# Altium PCB v0-9Bcpu.PcbDoc (part 2 of 2)
Units mil, origin at the board's own origin, x right, y up, seen from the top; angles counter-clockwise.
Board outline 3900 x 3900 mil, 2 copper layers (Top Layer, Bottom Layer); 133 components, 139 nets, 510 pads, 236 vias.
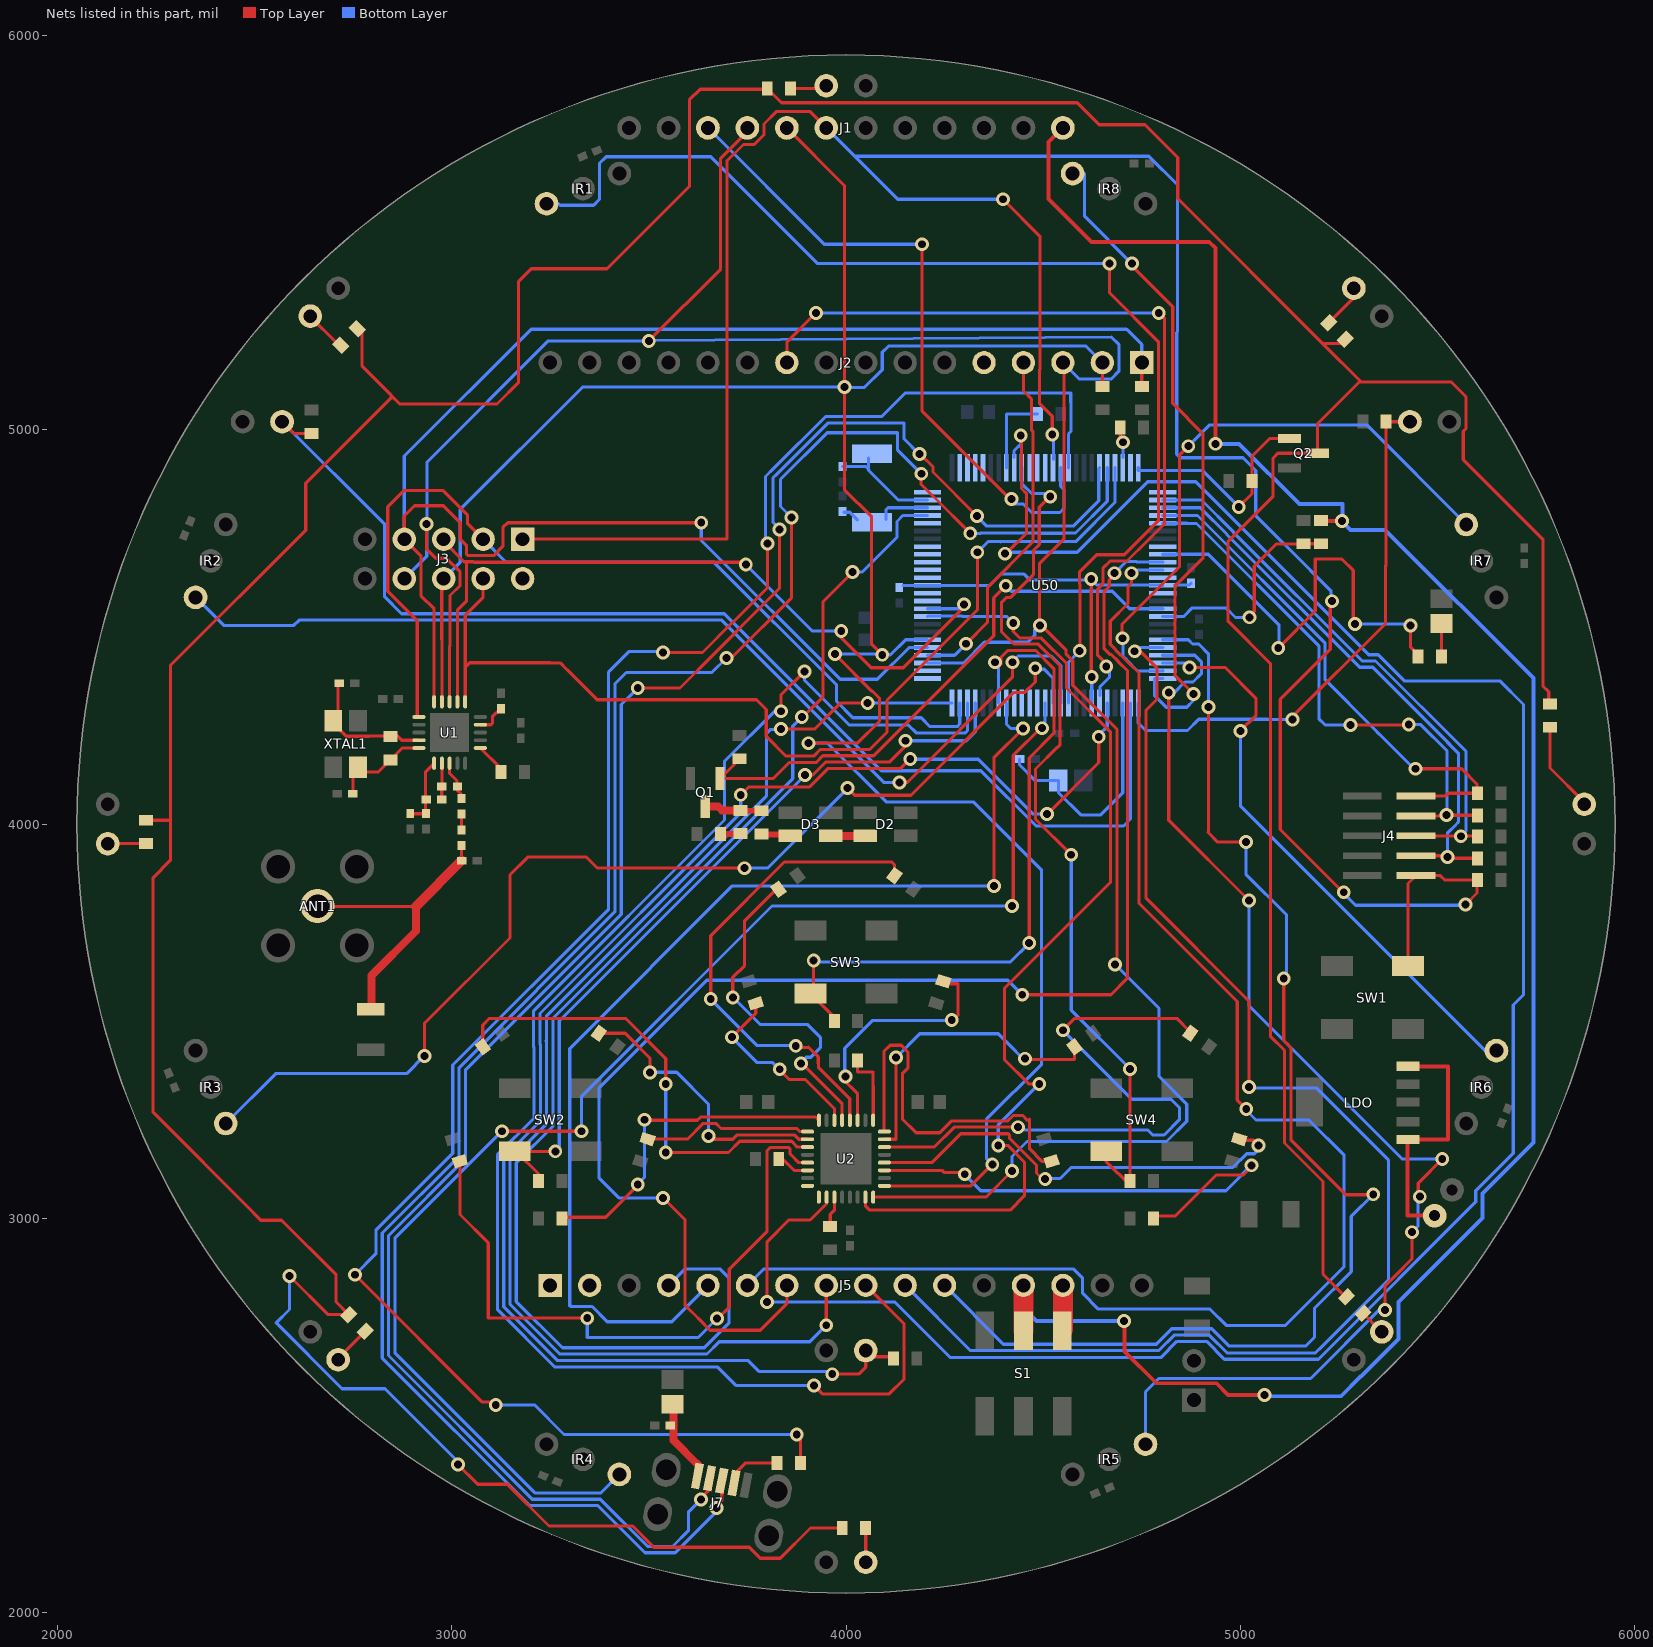
[diagram p2: the nets of this part, all layers, seen from the top]

## Via types
v1: diameter 35, hole 20, Top Layer to Bottom Layer, 228 vias
v2: diameter 25.98, hole 12.99, Top Layer to Bottom Layer, tented top, 4 vias
v3: diameter 180, hole 160, Top Layer to Bottom Layer, 4 vias

## Nets (pads, with @x,y where several pads share a name; then routed paths per layer and width w, separated by ;. In a path a pad name is that pad's centre, name@x,y a point inside that pad or via, vN(x,y) a via of type N, cw(c..) or ccw(c..) an arc to the next point about the centre after c; other vN are vias at no path point) (continued)
GYROA_Z_4: J2.10 U50.6 | length 2123.9
  Top Layer w8: J2.10@3850,5170 3850,5222 v1(3924,5296) ; v1@4665.5,4388.7 4665.5,4400 4638,4427.5 4638,4595.28 4651.5,4608.78 4651.5,4648.22 4670.08,4666.8 4712.42,4666.8 4739.08,4693.45 4739.45,4693.45 4808,4762 4808,5281 v1(4793,5296)
  Bottom Layer w8: v1(3924,5296) v1(4793,5296) ; U50.6@4644,4326 4644,4348 4668,4372 v1@4668,4394
  other v1: 4660,4399
IR_RECV_0: IR1.1 U50.10 | length 2947.8
  Top Layer w8: v1@4592,4439 4592,4439.06 4593,4440.06 4593,4608.28 4592.5,4608.78 4592.5,4639.5 4635.8,4682.8 4705.8,4682.8 4723.08,4700.08 4792,4769 4792,5222.66 4668,5346.66 v1(4668,5421) ; v1(4592.5,4439.06) v1@4593,4439.56
  Bottom Layer w8: IR1.1@3240.61,5572.73 3271,5572.73 3274.73,5569 3360,5569 3375,5584 3375,5675 3392,5692 3657,5692 3928,5421 v1(4668,5421) ; U50.10@4564.06,4306.77 4564.06,4410.61 v1(4592.5,4439.06)
IR_RECV_1: IR2.1 U50.11 | length 2662.9
  Top Layer w8: v1@4137,4106 4156,4106 4422,4372 v1(4422,4410)
  Bottom Layer w8: IR2.1@2350.73,4574.61 2421.84,4503.5 2600,4503.5 2613.5,4517 3685,4517 4097,4105 v1(4136,4105) ; v1@4418,4408 4436,4426 4520,4426 4544.37,4401.63 U50.11@4544.37,4306.77
IR_RECV_2: IR3.1 U50.12 | length 2846.2
  Top Layer w8: v1(2931,3412) 2931,3494 3148,3711 3148,3871 3193,3916 3342,3916 3370,3888 v1(3743,3888) ; v1(4004,4091) 4022,4073 4164.91,4073 4425.61,4333.7 4453.7,4333.7 4480,4360 v1@4480,4394
  Bottom Layer w8: IR3.1@2427.27,3240.61 2553.66,3367 2886,3367 v1(2931,3412) ; v1(3743,3888) 3801,3888 v1(4004,4091) ; v1@4481.5,4392.5 4502.5,4392.5 4524.69,4370.31 U50.12@4524.69,4306.77
  other v1: 4480,4395
IR_RECV_3: IR4.1 U50.13 | length 3549.9
  Top Layer w8: v1(3128,3221) v1(3329,3221) ; v1(4421,3792) 4424,3792 4424,4174 4496,4246 4497,4245 v1(4497,4243)
  Bottom Layer w8: v1(3128,3221) 3127.25,3221 2856,2949.75 2856,2659 3211,2304 3378.66,2304 IR4.1@3425.39,2350.73 ; v1(3329,3221) 3329,3308.63 3812.37,3792 v1(4421,3792) ; v1(4497,4243) 4497,4245 4496,4246 4505,4255 U50.13@4505,4306.77
IR_RECV_4: IR5.1 U50.97 | length 3041.4
  Top Layer w8: v1(4818.5,4333) 4818.5,4300.85 4819,4300.35 4819,4233.65 4818.5,4233.15 4818.5,4009.5 v1(5022,3806) ; v1(5367,2768) 5367,2829.07 5394,2856.07 5394.07,2856.07 5435,2897 v1(5435,2965) ; v1(5455,3055) 5451,3059 5451,3089.5 v1(5512,3150.5)
  Bottom Layer w8: IR5.1@4759.39,2427.27 4759.39,2560 4793.39,2594 5065,2594 ; U50.97@4803.23,4427.83 4884.17,4427.83 4901,4411 4901,4381.07 4880,4360.07 4859.39,4360.07 4832.32,4333 v1(4818.5,4333) ; v1(5022,3806) 5022,3539 5410.5,3150.5 v1(5512,3150.5) ; 5067.28,2594 5065,2594 ; v1(5367,2768) 5352,2768 5178,2594 5065,2594 ; v1(5435,2965) 5450.63,2980.63 5450.63,3050.63 v1(5455,3055)
IR_RECV_5: IR6.1 U50.98 | length 1469
  Top Layer w8: v1(4871,4397) 4961,4397 5040,4318 5040,4276 v1(5000,4236)
  Bottom Layer w8: U50.98@4803.23,4408.15 4859.85,4408.15 v1(4871,4397) ; v1(5000,4236) 5000,4046 5620.61,3425.39 IR6.1@5649.27,3425.39
IR_RECV_6: IR7.1 U50.99 | length 1551.3
  Top Layer w8: v1@4700,4471 4700,4507 4846,4653 4846,4936 v1(4868,4958)
  Bottom Layer w8: v1(4701,4471) 4702.5,4469.5 4702.5,4425.78 4711,4417.28 4711,4416.28 4739.28,4388 4802.76,4388 U50.99@4803.23,4388.46 ; v1(4868,4958) 4922,5012 5320.12,5012 IR7.1@5572.73,4759.39
IR_RECV_7: IR8.1 U50.100 | length 1722.3
  Top Layer w8: v1(4725,5421) 4725,5415.59 4828.59,5312 4828.59,5066.41 4905,4990 4905,4674 4834,4603 4834,4377 v1(4881,4330)
  Bottom Layer w8: IR8.1@4574.61,5649.27 4605,5649.27 4605,5541 v1(4725,5421) ; U50.100@4803.23,4368.78 4782,4368.78 4782,4326 4812,4296 4864,4296 4881,4313 v1(4881,4330)
JTAG_TCK: J4.4 R12.1 U50.80 | length 1397.3
  Top Layer w8: v1(5279,4251) 5426,4251 v1(5427,4252) ; J4.4@5445.11,4020.39 v1@5522,4020.39 ; v1(5523,4023) v1@5524,4022 ; v1@5528,4014 5528,4018 v1@5524,4022 ; R12.1@5601.69,4022 v1@5524,4022
  Bottom Layer w8: U50.80@4803.23,4762.48 4864,4762.48 4864.48,4762 4888.75,4762 5199,4451.75 5199,4267 5215,4251 v1(5279,4251) ; v1(5427,4252) 5457.37,4252 5524,4185.37 5524,4024 v1(5523,4023)
JTAG_TDI: J4.8 R18.1 U50.78 | length 1444.7
  Top Layer w8: J4.8@5445.11,3919.61 v1@5519,3919.61 ; v1@5525.61,3913 R18.1@5601.47,3913
  Bottom Layer w8: U50.78@4803.23,4801.85 4898.52,4801.85 4966.02,4734.36 4966.02,4733.36 5299.69,4399.69 ; 5302.04,4397.33 5336.04,4397.33 5530,4203.37 ; 5525,4207 5552.69,4179.31 5552.69,4004.69 5546.78,3998.78 ; v1@5526,3910.63 v1@5526,3916 ; v1@5527,3917 5525,3919 5530,3924 5525,3929 5525,3976.72 5546.78,3998.5
  other v1: 5525,3916
JTAG_TDO: J4.6 R17.1 U50.77 | length 1412.2
  Top Layer w8: J4.6@5445.11,3970 5601.47,3970 R17.1@5601.47,3968
  Bottom Layer w8: U50.77@4803.23,4821.54 4901.46,4821.54 4982.02,4740.98 4982.02,4739.98 5308.67,4413.33 5342.67,4413.33 5572,4184 5572,3982 v1(5559,3969)
JTAG_TMS: J4.2 R11.1 U50.79 | length 1359
  Top Layer w8: J4.2@5413,4070.79 J4.2@5445.11,4070.79 5519,4070.79 5526.21,4078 R11.1@5601.47,4078 ; v1(5444,4140) 5561,4140 5600,4101 R11.1@5600,4085
  Bottom Layer w8: U50.79@4803.23,4782.17 4891.21,4782.17 5215,4458.37 5215,4365.35 5337.68,4242.68 ; 5352.35,4228 5337.68,4242.68 ; v1@5443,4144 5436.35,4144 5337.68,4242.68
LED_BLUE_0: D21.2 U2.3 | length 1299.3
  Top Layer w8: U2.3@4097.44,3121.77 4243.73,3121.77 4249.5,3116 4289,3116 4293,3112 v1(4301,3112) ; D21.2@4779.53,3000 4779.53,3006 4835,3006 4939,3110 5008,3110 5028,3130 v1(5028,3134.5)
  Bottom Layer w8: v1@4293.5,3118.5 4342,3070 4963.5,3070 v1(5028,3134.5)
LED_BLUE_1: D19.2 U2.4 | length 1136.8
  Top Layer w8: U2.4@4097.44,3141.46 4217.5,3141.46 4290.54,3214.5 4411.07,3214.5 4414.6,3210.98 4414.6,3203.12 4483,3134.72 4483,3115 4499,3099 v1@4506,3099 ; D19.2@4998,3198 5033,3198 v1(5046,3185)
  Bottom Layer w8: v1@4506,3101 4543,3101 4571,3129 4980.78,3129 5015.78,3164 5035,3164 5046,3175 v1(5046,3185)
  other v1: 4505,3100
LED_BLUE_2: D13.2 U2.6 | length 1553.6
  Top Layer w8: U2.6@4097.44,3180.83 4134.83,3180.83 4135,3181 4224,3181 4274.29,3231.29 v1(4436,3231.29) ; v1(4550,3477) 4580,3507 4838.65,3507 4873.11,3472.54 D13.2@4873.11,3469.36
  Bottom Layer w8: v1(4436,3231.29) 4446.71,3231.29 4454,3224 4765.28,3224 4777.78,3211.5 4806.5,3211.5 4846,3251 4846,3280 4824,3302 4725,3302 v1(4550,3477)
LED_BLUE_3: D12.2 U2.7 | length 779.7
  Top Layer w8: U2.7@4097.44,3200.51 4127,3200.51 v1(4127,3408) ; v1(4454,3405) 4451.64,3402.64 4579.11,3402.64 D12.2@4579.11,3434.64
  Bottom Layer w8: v1(4127,3408) 4187,3468 4386,3468 4411,3443 ; 4411.29,3443 4411,3443 ; v1@4451.36,3402.64 4411,3443 ; v1@4451.64,3402.64 v1(4454,3405)
LED_BLUE_4: D18.2 U2.8 | length 959.1
  Top Layer w8: 4096,3418.72 4096,3220.2 U2.8@4097.44,3220.2 ; 4096,3421 4096,3423 4112,3439 4140,3439 4157,3422 4157,3381 4143,3367 4143,3252 4178,3217 4237.37,3217 4267.66,3247.29 4410.28,3247.29 4423.78,3260.79 4448.22,3260.79 4461.26,3247.76 4465.5,3252 4465.5,3176.13 4496.71,3144.92 D18.2@4521.12,3144.92
LED_EXTRA: D17.2 U2.22 | length 84.3
  Top Layer w8: D17.2@3830,3150 3840,3150 3868.23,3121.77 U2.22@3902.56,3121.77
LED_FAULT: U2.25
LED_GREEN_0: D14.2 U2.9 | length 190.5
  Top Layer w8: D14.2@4029.53,3400 4029.53,3371 4068.5,3371 4068.9,3370.6 4068.9,3335.5 4069,3335.4 4069,3248.84 U2.9@4068.9,3248.74
LED_GREEN_1: D9.2 U2.11 | length 662.3
  Top Layer w8: v1@3990,3358 v1@3992,3358 ; v1@3992,3359 v1@3992,3358 ; v1@4001,3358 v1@3992,3358 ; U2.11@4029.53,3248.74 4029.53,3315.75 3992,3353.28 v1@3992,3358 ; D9.2@4247.12,3601.08 4247.12,3603 4248.08,3602.04 4255.12,3595 4284,3595 4284,3515 4272,3503 v1(4268,3503)
  Bottom Layer w8: v1@3997,3361 3997,3431 4068,3502 v1@4280,3502
  other v1: 3999,3360
LED_GREEN_2: D7.2 U2.12 | length 1274.4
  Top Layer w8: v1(3657,3556) 3657,3717 3843.79,3903.79 4116.21,3903.79 4123.11,3896.89 D7.2@4123.11,3869.36 ; v1(3872.69,3437.5) 3872.69,3438.69 v1@3874,3440 ; v1@3873,3441 v1@3874,3440 ; U2.12@4009.84,3248.74 4009.5,3249.08 4009.5,3303.5 3930,3383 3930,3392.01 3929.5,3392.51 3929.5,3409.5 3905,3434 3905,3433 3887.78,3433.5 3887.28,3433 3881,3433 3874.6,3439.41 v1@3874,3440
  Bottom Layer w8: v1(3657,3556) 3775,3438 3861,3438 3867.1,3431.91 v1@3874,3425
LED_GREEN_3: D5.2 U2.13 | length 870.5
  Top Layer w8: v1(3713,3560) 3713,3610.95 ; 3713.05,3610.95 3743,3640.91 3743,3754.91 3822.74,3834.64 D5.2@3829.11,3834.64 ; v1@3885,3396 3990.16,3290.84 U2.13@3990.16,3248.74
  Bottom Layer w8: v1@3714,3560 3782,3492 3902,3492 3935,3459 3935,3433 3910.5,3408.5 3898.5,3408.5 v1@3886,3396
  other v1: 3886,3393
LED_GREEN_4: D8.2 U2.14 | length 474.8
  Top Layer w8: v1(3710.56,3459.44) 3771.12,3520 D8.2@3771.12,3544.92 ; v1@3831,3377 3856,3352 3897,3352 3970.47,3278.53 U2.14@3970.47,3248.74
  Bottom Layer w8: v1(3710.56,3459.44) 3775,3395 3814,3395 v1@3831,3378
  other v1: 3832,3378
LED_HEARTBEAT: R10.2 U50.84 | length 1163.4
  Top Layer w8: v1(5096,4446) 5190,4540 5190,4672 5257,4672 5286,4643 5286,4512 v1(5291,4507) ; v1(5431,4503) 5431,4449 R10.2@5446,4434 ; R10.2@5441,4422 R10.2@5449,4422
  Bottom Layer w8: U50.84@4803.23,4683.74 4803.49,4684 4918.66,4684 5098.33,4504.33 5098.33,4448.33 v1(5096,4446) ; v1(5291,4507) 5427,4507 v1@5430,4504
LED_IR_BEACON: Q1.1 R35.2 U50.91 | length 1477.1
  Top Layer w8: Q1.1@3680.4,4115.43 Q1.1@3680.4,4115 ; R35.2@3730,4165.47 3730,4164.6 Q1.1@3680.4,4115 ; v1(4405.07,4604) 4374.5,4573.43 4374.5,4477.5 4070,4173 3941.46,4173 3924.46,4156 3856,4156 3815,4115 Q1.1@3680.4,4115
  Bottom Layer w8: v1(4405.07,4604) 4419.07,4590 4675.06,4590 4719.11,4545.94 U50.91@4803.23,4545.94
LED_IR_COMMS: Q2.1 R36.2 U50.75 | length 555.9
  Top Layer w8: v1(4996,4804) 5029.53,4837.53 R36.2@5029.53,4870 5029.53,4932.53 5074.4,4977.4 Q2.1@5124.57,4977.4
  Bottom Layer w8: U50.75@4741.22,4903.23 4741.22,4896.5 4903.5,4896.5 v1(4996,4804)
LED_MODE: U2.26 U50.59 | length 5754.8
  Top Layer w8: v1(3800,2788) 3800,2941 3855,2996 3908.98,2996 3950.79,3037.8 U2.26@3950.79,3053.86 ; v1(4402.78,4685.5) 4405.5,4685.5 4458,4738 4458,4837.81 4445,4850.81 4445,4983 v1(4443,4985)
  Bottom Layer w8: v1(3800,2788) 4124,2788 4265,2647 4798,2647 4839,2688 4914.49,2688 4959.49,2643 5198,2643 5202,2647 ; v1(4402.78,4685.5) 4406.28,4689 4586,4689 4765,4868 4887,4868 5325.67,4429.33 5349.3,4429.33 5415.63,4363 5658,4363 5718,4303 5718,4183 ; U50.59@4426,4930 4426,4946 4444,4964 4444,4986 v1(4443,4985) ; 5203,2648 5597,3042 5597,3070.04 5692,3165.04 5692,3541 5718,3567 5718,4183 ; 5718,4192 5718,4183
LED_RED_0: D20.2 U2.16 | length 858.4
  Top Layer w8: D20.2@3279.53,3000 3278,3003 3391,3003 v1@3472,3084 ; v1(3489,3250) 3486,3250 3487.26,3248.74 3623.27,3248.74 3631.53,3257 3922.84,3257 U2.16@3931.1,3248.74
  Bottom Layer w8: v1@3472,3085 v1(3472,3086) 3472,3087 3489,3104 v1(3489,3250)
LED_RED_1: D16.2 U2.17 | length 430.6
  Top Layer w8: D16.2@3497.12,3201.08 3598.24,3201.08 3638.16,3241 3670,3241 3683,3228 3875,3228 3882.8,3220.2 U2.17@3902.56,3220.2
LED_RED_2: D11.2 U2.18 | length 719.5
  Top Layer w8: D11.2@3373.11,3469.36 3440,3469.36 3503,3406.36 v1@3503,3371 ; v1(3651,3209) 3659.49,3200.51 3712.88,3200.51 3724.09,3211.72 3868.66,3211.72 3879.86,3200.51 U2.18@3902.56,3200.51
  Bottom Layer w8: v1@3502.5,3370.5 3570.5,3370.5 3651,3290 v1(3651,3209) v1@3651,3208
  other v1: 3503,3370
LED_RED_3: D10.2 U2.19 | length 1184.7
  Top Layer w8: D10.2@3079.11,3434.64 3079.11,3490.11 3096,3507 3440.96,3507 3542.96,3405 ; v1(3543,3167) 3702,3167 3730.72,3195.72 3862.03,3195.72 3873,3184.75 3873,3184 3876.17,3180.83 U2.19@3902.56,3180.83 ; v1(3543,3341) 3543,3405
  Bottom Layer w8: v1(3543,3167) v1(3543,3341)
LED_RED_4: D15.2 U2.21 | length 1683.5
  Top Layer w8: D15.2@3021.12,3144.92 3021.12,3009.88 3093,2938 3093,2747 v1(3344,2747) ; v1@3675,2746 3704,2775 3704,2871 3800,2967 3800,3172 3807.72,3179.72 3854.66,3179.72 3857.94,3176.43 3857.94,3163.51 3880,3141.46 U2.21@3902.56,3141.46
  Bottom Layer w8: v1(3344,2747) 3344,2698 3625,2698 v1(3673,2746)
LED_SDO: U2.24
LIGHT_B: R28.1 R29.1 U50.5 | length 3878.5
  Top Layer w8: v1@3733,4073 3754,4094 3907.72,4094 3954.72,4141 4139,4141 v1(4163,4165) ; v1(3965,2605) 4032,2605 4050,2623 R29.1@4050,2665 4066,2649 4116.47,2649 R28.1@4120.47,2645 ; v1(4510,4025) 4641,4156 v1(4641,4221)
  Bottom Layer w8: v1(3733,4074) 3733,4028.37 3224,3519.37 3224,3441.51 3225,3440.51 3225,3247 3132,3154 3132,2775.75 3267.75,2640 3751,2640 3779,2612 3958,2612 v1(3965,2605) ; v1(4163,4165) 4164,4164 4335.63,4164 4474.63,4025 v1(4510,4025) ; v1@4641,4225.52 4662.48,4247 U50.5@4662.48,4306.77
LIGHT_FL: R5.1 R6.1 U50.2 | length 3072.6
  Top Layer w8: R5.1@2570,5020 2599.53,4990.47 R6.1@2645,4990.47
  Bottom Layer w8: R5.1@2570,5020 2830,4760 2830,4576 2873,4533 3691.63,4533 4089.63,4135 4342,4135 4482,3995 4704,3995 4721.54,4012.54 U50.2@4721.54,4306.77
LIGHT_FR: R8.1 R9.1 U50.1 | length 1375.7
  Top Layer w8: v1@5129,4269 5368,4508 5368,4655 5369.53,4655 R9.1@5369.53,5020 R8.1@5430,5020
  Bottom Layer w8: U50.1@4741.22,4306.77 4741.22,4256 4760.22,4237 4866,4237 4894.5,4265.5 5068.5,4265.5 ; 5066,4265 v1(5132,4265)
MISC: J3.2 | length 7.1
  Top Layer w8: J3.2@3175,4627 J3.2@3180,4622
MOT0_CUR: J5.1
MOT0_PWMA: J5.4 U50.47 | length 3384.6
  Top Layer w8: v1@3889,4270 3942,4323 3942,4564.17 v1(4016.83,4639)
  Bottom Layer w8: J5.4@3550,2830 3592,2872 3680,2872 3703,2849 3703,2734 3641,2672 3281,2672 3164,2789 3164,3140.75 3257,3233.75 3257,3507.12 3865,4115.12 3865,4248 v1(3888,4271) ; v1(4016.83,4639) 4041,4639 4129.18,4727.18 4129.18,4767.18 4144.17,4782.17 U50.47@4206.77,4782.17
MOT0_PWMB: J5.5 U50.18 | length 2814.6
  Top Layer w8: v1(4375,3843) 4375,4168 v1(4449,4242)
  Bottom Layer w8: 3304,2776.5 3356.22,2776.5 3394.72,2738 3558,2738 J5.5@3636.5,2816.5 ; 3304,2777 3301,2777 3299.5,2778.5 3299.5,3430.5 3712,3843 v1(4375,3843) ; U50.18@4406.57,4306.77 4406.57,4253.43 4418,4242 v1(4449,4242)
MOT1_CUR: J5.2
MOT1_PWMA: J5.6 U50.86 | length 3841.6
  Top Layer w8: 4697.13,4428.22 4670,4455.35 4670,4514 4715,4559 4715,4602 4724,4611 v1(4724,4636) ; 4697.41,4428.22 4730,4395.63 4730.37,4395.63 4743,4383 4743,3799 4992,3550 4992,3300 v1(5015,3277)
  Bottom Layer w8: J5.6@3750,2830 3792,2872 4576,2872 4600,2848 4600,2810 4640,2770 4923,2770 4965,2728 5113,2728 5263,2878 5263,3160 5173.5,3249.5 5039.5,3249.5 v1@5018,3271 ; v1@4733.37,4644.37 U50.86@4803.23,4644.37
MOT1_PWMB: J5.7 U50.85 | length 3748.5
  Top Layer w8: v1(3536,3052) 3592,2996 3592,2779.5 3607.75,2763.75 3608.25,2763.75 3639.25,2732.75 3639.25,2732.25 3655,2716.5 3782.5,2716.5 3850,2784 J5.7@3850,2830 ; v1(4447,3567) 4672,3567 4713.48,3608.48 4713.48,4339.52 4713.36,4339.64 4714,4340.28 4714,4388 4690.5,4411.5 ; v1@4681.5,4632.5 4667.5,4618.5 4667.5,4602.15 4654,4588.65 4654,4445.72 4670.22,4429.5 4673.22,4429.5 4690.5,4412.22
  Bottom Layer w8: v1(3536,3052) 3424,3052 3374,3102 3374,3331 3647,3604 4410,3604 v1(4447,3567) ; v1@4680,4636 v1(4681,4636) 4710.5,4665.5 4736.22,4665.5 4737.72,4664 4803.17,4664 U50.85@4803.23,4664.06
NetANT1_1: ANT1.1 ANT2.1 C5.1 C6.2 | length 763.5
  Top Layer w8: ANT1.1@2657,3791 2908,3791 ; C6.2@3025.31,3907 C5.1@3025.31,3946.69
  Top Layer w20: ANT2.1@2795,3530 2797,3531 2797,3616 2909.32,3728.32 2909.32,3791
  Top Layer w25: 2909.32,3791 C6.2@3025.31,3907
NetC1_2: C1.2 R1.1 U1.9 XTAL1.1 | length 373
  Top Layer w8: C1.2@2715.31,4357 2712,4359 2712,4287 2701,4276 2700,4276 XTAL1.1@2700,4262 2700,4258 2697,4258 2732.56,4222.44 2790.6,4222.44 2791.16,4223 2836,4223 2842,4229 2845,4229 R1.1@2845,4221.53 2850,4221.53 2850,4229 2857,4229 2873.69,4212.32 U1.9@2917.24,4212.32
NetC2_2: C2.2 R1.2 U1.10 XTAL1.3 | length 337.1
  Top Layer w8: C2.2@2749.69,4077 2750,4078 2750,4143 2764,4157 2770.05,4150.95 2776,4145 2775,4145 2775,4139 XTAL1.3@2762.99,4139 ; XTAL1.3@2762.99,4143.89 XTAL1.3@2762.99,4139 ; U1.10@2917.24,4192.63 2874.63,4192.63 2814,4132 2774,4132 2774,4121 2757.05,4137.95 2757,4138 2762.99,4138 XTAL1.3@2762.99,4139
NetC3_2: C3.2 C4.2 L2.2 U1.11 | length 179.2
  Top Layer w8: C4.2@2894,4026.69 2894,4026 2934,4026 L2.2@2934,4062 ; L2.2@2935.31,4062 L2.2@2934,4062 ; U1.11@2955.63,4154.24 2934,4132.61 L2.2@2934,4062
NetC5_2: C5.2 L3.2 | length 36.7
  Top Layer w8: C5.2@3024,3986 3025,3987 L3.2@3025,4022.31
NetC7_2: C7.2 U1.19 | length 79.5
  Top Layer w8: U1.19@3072.76,4251.69 3099.69,4251.69 3104.08,4256.08 3104.08,4273.08 3124,4293 C7.2@3125,4292.31
NetC15_2: C15.2 J7.1 L5.1 | length 214.8
  Top Layer w10: 3560,2491 L5.1@3560,2528.5
  Top Layer w20: L5.1@3560,2528.5 3562.56,2524.44 C15.2@3562.56,2475 ; C15.2@3563,2475 3563,2437 J7.1@3623.14,2376.86
NetD1_2: D1.2 R10.1 | length 78.5
  Top Layer w8: R10.1@5509.53,4425 D1.2@5509.53,4503.53
NetD2_4: D2.4 D3.2 | length 87.8
  Top Layer w8: D2.4@4048.82,3970 D2.4@4049,3970
  Top Layer w20: D3.2@3961.18,3970 D2.4@4048.82,3970
NetD3_4: D3.4 R15.2 | length 77.3
  Top Layer w8: D3.4@3832.82,3973 3832.82,3970 D3.4@3858.82,3970
  Top Layer w15: R15.2@3786,3974.47 3786,3973 D3.4@3832.82,3973
NetD4_2: D4.2 R16.2 | length 50.5
  Top Layer w15: D4.2@3681.53,3975 3730,3975 R16.2@3732,3975.47
NetJ6_1: J6.1 LDO.1 LDO.5 | length 649.6
  Top Layer w10: LDO.5@5425,3385.55 5526,3385.55 5526,3200 LDO.1@5425,3200 5424,3200 5424,3007 J6.1@5492,3007
NetJ7_4: J7.4 R3.2 | length 120.5
  Top Layer w8: J7.4@3717,2351 3746,2380 R3.2@3825.47,2380
NetL1_1: L1.1 L2.1 U1.12 | length 92.4
  Top Layer w8: L2.1@2974.69,4062 2975,4063 2975,4099 2975.32,4099.32 U1.12@2975.32,4154.24
NetL1_2: L1.2 L3.1 U1.13 | length 81.7
  Top Layer w8: U1.13@2995,4154.24 2995,4128 3014,4109 L1.2@3014,4097 ; L1.2@3014.69,4085.31 L3.1@3025,4075 ; L1.2@3014.69,4095 L1.2@3014.69,4097
NetQ1_3: Q1.3 R15.1 R16.1 | length 140.2
  Top Layer w8: R16.1@3728,4034.53 R16.1@3732,4034.53
  Top Layer w15: R16.1@3739,4033.53 R15.1@3786,4033.53
  Top Layer w20: Q1.3@3643,4044.57 3676,4044.57 3686.04,4034.53 R16.1@3728,4034.53
NetQ2_3: Q2.3 R4.2 R7.2 R13.2 R14.2 R19.2 R26.2 R27.2 R32.2 | length 12443.6
  Top Layer w8: R14.2@2220,4006 R14.2@2223.53,4009.53 ; R14.2@2222,4010 2222.47,4009.53 R14.2@2223.53,4009.53 ; R14.2@2224,4010 R14.2@2223.53,4009.53 ; v1(2589,2854) 2687,2756 R27.2@2735,2756 ; R27.2@2739.12,2755.88 2707,2788 2707,2857 2568.78,2995.22 2515.78,2995.22 2499.5,3011.5 2499.5,3012.5 2243,3269 2243,3864 2287,3908 2287,4009.53 ; R19.2@2760.88,5255.88 2773,5255.88 2773,5161 2846,5088 ; 2846,5089 2846,5088 ; v1(3016,2376) 3066,2326 3141,2326 3247,2220 3459,2220 3513,2166 3754.78,2166 3782.46,2138.32 3833.32,2138.32 3910,2215 R32.2@3990.47,2215 ; 5076,3863 5076,3462 5112,3426 5112,3191 5209.36,3093.64 5209.36,2858.64 5265,2803 5270,2803 R26.2@5269.12,2800.88 ; 5076,3865 5076,4407 4969,4514 4969,4717 5083,4831 5083,4928 5095,4940 Q2.3@5195.43,4940 5195.43,5014.43 5302,5121 5306,5121 ; R7.2@5266,5229 5255,5218 5209,5218 ; R13.2@5785,4304.53 5782,4307 5782,4335 5767,4350 5767,4722 5565,4924 5565,4995.6 5572,5002.6 5572,5083 5534,5121 5306,5121 ; R14.2@2223.53,4009.53 R14.2@2225,4009.53 2287,4009.53 ; 2287,4009.53 2287,4402 2630,4745 2630,4864 2846,5080 2846,5087 ; 2846,5087 2868,5065 3115,5065 3170,5120 3170,5376 3202,5408 3394,5408 3602.5,5616.5 3603,5619 3603,5836 3630,5863 3798.47,5863 R4.2@3800.47,5865 3836.47,5829 4586,5829 4642,5773 4758,5773 4841,5690 4841,5586 5209,5218 ; 2846,5087 2846,5088 ; 5209,5218 5306,5121
  Bottom Layer w8: v1(2589,2854) 2589,2769 2555,2735 2722,2568 2831,2568 3015,2384 v1@3015,2381
NetR2_2: R2.2 U1.16 | length 87.9
  Top Layer w8: U1.16@3072.76,4192.63 3124.39,4141 3126,4141 3126,4139 3128.85,4139 3128.85,4135.38 R2.2@3125.47,4132
NetR4_1: R4.1 T1.1 | length 100
  Top Layer w8: R4.1@3859.53,5865 3946,5865 3948,5867 3950.47,5865.47 3951,5866 3951,5867 3950,5867 T1.1@3950,5872
NetR7_1: R7.1 T8.1 | length 115.6
  Top Layer w8: R7.1@5224.12,5270.88 5285,5331.76 5285,5356 5284,5357 T8.1@5287.64,5358.36
NetR13_1: R13.1 T7.1 | length 231.5
  Top Layer w8: R13.1@5785,4245.47 5785,4142 5872,4055 T7.1@5872,4050
NetR14_1: R14.1 T3.1 | length 97.2
  Top Layer w8: T3.1@2128,3950 2130,3950 2130.47,3950.47 R14.1@2225,3950.47
NetR19_1: R19.1 T2.1 | length 114.6
  Top Layer w8: T2.1@2641.64,5287.64 2643,5286 2643,5285.12 R19.1@2705.64,5222.48 ; R19.1@2705.64,5223.64 R19.1@2705.64,5222.48 ; R19.1@2719.12,5214.12 2705.64,5214.12 R19.1@2705.64,5222.48
NetR25_2: R25.2 U2.27 | length 78.2
  Top Layer w8: R25.2@3960,2980 3960,3010 3970.47,3020.47 U2.27@3970.47,3053.86
NetR26_1: R26.1 T6.1 | length 66.7
  Top Layer w8: R26.1@5310.88,2759.12 5355,2715 T6.1@5358.36,2712.36
NetR27_1: R27.1 T4.1 | length 103.1
  Top Layer w8: T4.1@2712.36,2641.64 2715,2641 2715,2648.24 R27.1@2780.88,2714.12
NetR32_1: R32.1 T5.1 | length 87.5
  Top Layer w8: R32.1@4049.53,2215 4049,2214 4050,2213 T5.1@4050,2128
NetR33_2: R33.2 U50.58 | length 214.2
  Bottom Layer w8: U50.58@4406.57,4903.23 4406.57,4960 ; 4407,4961 4407,5040 R33.2@4485.47,5040
OSC0: C29.2 U50.48 XTAL2.1 | length 174.4
  Bottom Layer w8: C29.2@3995,4790.31 4009.69,4790.31 XTAL2.1@4029,4771 ; XTAL2.1@4101,4772 4101,4796.31 4106.54,4801.85 U50.48@4206.77,4801.85
OSC1: C30.2 U50.49 XTAL2.2 | length 282.9
  Bottom Layer w8: C30.2@3991,4906.69 4049.31,4906.69 4057,4899 ; XTAL2.2@4057,4928 4057,4899 ; 4058,4898 4057,4899 ; U50.49@4206.77,4821.54 4132.08,4821.54 4057,4896.61 4057,4899
PA0: U50.26
PA1: U50.27
PB7: U50.89
PE0: U50.74
PF1: U50.61
PF4: U50.42
PF5: U50.41
PG7: U50.36
PH3: U50.83
PH4: U50.76
PH5: U50.63
PH6: U50.62
PH7: U50.15
PJ0: U50.14
PJ1: U50.87
PJ2: U50.39
PJ3: U50.50
PJ4: U50.52
PJ5: U50.53
PJ6: U50.54
PJ7: U50.55
QEI_0A: J5.8 U50.25 | length 3205.2
  Top Layer w8: v1(3835,4241) 3921,4241 3987,4307 v1(4055,4307) ; v1(3950,2729) J5.8@3950,2830
  Bottom Layer w8: v1@3835,4240 3809,4240 3798,4229 3798,4070.75 3241,3513.75 3241,3451.37 3240,3450.37 3240,3448.14 3241,3447.14 3241,3240.37 3148,3147.37 3148,2782.37 3274.37,2656 3647.63,2656 3678.63,2687 3908,2687 v1(3950,2729) ; v1(4055,4307) 4268.78,4307 U50.25@4268.78,4306.77
QEI_0B: J5.9 U50.23 | length 3927.6
  Top Layer w8: v1(3835,4286) 3835,4327 v1(3895,4387) ; v1(3919,2576) 3940,2555 4110,2555 4147,2592 4147,2733 J5.9@4050,2830
  Bottom Layer w8: v1(3835,4286) 3819,4286 3692,4159 3692,4010 3208,3526 3208,3434.88 3209,3433.88 3209,3254 3116,3161 3116,2769.12 3262.12,2623 3675,2623 3722,2576 v1(3919,2576) ; v1(3895,4387) 3895,4364 4008,4251 4158,4251 4178,4231 4302.37,4231 4308.15,4236.78 U50.23@4308.15,4306.77
QEI_1A: J5.10 U50.96 | length 3470.3
  Top Layer w8: v1@4732,4437 4747,4437 4789,4395 4789,4317 4761,4289 4761,3812 5022,3551 v1(5022,3333)
  Bottom Layer w8: J5.10@4150,2830 4315,2665 4793.37,2665 4832.37,2704 4921.12,2704 4966.12,2659 5190.63,2659 5207.5,2675.87 5207.87,2675.87 5376,2844 5376,3147 5192,3331 v1@5022,3331 ; v1(4732,4438) 4741.52,4447.52 U50.96@4803.23,4447.52
QEI_1B: J5.11 U50.95 | length 3224
  Top Layer w8: v1(4919,4297) 4919,3980 4918,3979 4943,3954 v1(5014,3954) ; v1(5110,3608) 5110,3451 5121,3440 ; 5121,3439.63 5128,3432.63 5128,3199 5267,3060 v1@5334,3060
  Bottom Layer w8: J5.11@4250,2830 4399,2681 4786.75,2681 4825.75,2720 4927.75,2720 4971.75,2676 5165,2676 5188,2699 5188,2772 5281,2865 5281,3005 v1@5336.5,3060.5 ; U50.95@4803.23,4467.2 4867.75,4467.2 4878.45,4456.51 4894.49,4456.51 4919,4432 v1(4919,4297) ; v1@5016,3952 v1(5014,3954) 5014,3873 5117,3770 5117,3619 v1@5112,3614
  other v1: 5337,3061
RADIO_CE: J3.4 U1.1 U50.72 | length 2609.7
  Top Layer w8: U1.1@3034.37,4309.76 3034.37,4397.74 ; J3.4@3080,4622 3080,4574.94 3034.37,4529.31 3034.37,4397.74 ; v1(4333,4689) 4333,4542.5 4104,4313.5 4104,4233 4060,4189 3934.84,4189 3917.84,4172 3848,4172 3797.82,4222.18 3797.82,4290.18 3773,4315 3369,4315 3292.78,4391.22 3292.5,4391.22 3275.22,4408.5 3250.78,4408.5 3250.28,4409 3045.63,4409 3034.37,4397.74
  Bottom Layer w8: v1(4333,4689) 4360,4716 4392,4716 ; 4392,4715 4392,4716 ; U50.72@4682.17,4903.23 4682.17,4815.74 4582.43,4716 4392,4716
RADIO_IRQ: J3.3 U1.6 U50.24 | length 2376.9
  Top Layer w8: U1.6@2917.24,4271.37 2913,4271.37 2913,4515 2838,4590 2838,4804 2880,4846 2977.21,4846 3040.61,4782.61 3040.61,4761.39 J3.3@3080,4722
  Bottom Layer w8: J3.3@3080,4722 3138,4664 3665,4664 3976,4353 3976,4311 4017.5,4269.5 4190.5,4269.5 4213,4247 4282,4247 4288.46,4253.46 U50.24@4288.46,4306.77
RST: J1.6 J3.1 J4.10 R20.1 SW1.3 U50.64 | length 6859
  Top Layer w8: J3.1@3186,4723 3698,4723 3698,5681 3740,5723 3767.4,5723 3792,5747.6 3792,5775 3824,5807 3908,5807 J1.6@3950,5765 ; v1(4398,5584) 4491.53,5490.47 4491.53,5152.8 4491,5152.27 4491,5066 4523,5034 v1(4523,4988) ; v1(5232,4565) 5228,4561 5228,4443 5101,4316 5101,3986 5250,3837 5250,3827 v1(5262,3827) ; SW1.3@5425,3640 5425,3849.1 J4.10@5445.11,3869.21 5507.11,3869.21 5518.33,3858 R20.1@5601.47,3858 ; v1(5571,3796) 5600,3825 R20.1@5600,3854
  Bottom Layer w8: J1.6@3950,5765 4022,5693 ; v1(4398,5584) 4131,5584 4022,5693 ; U50.64@4526,4925 v1@4526,4984 ; 5178,4642 5230,4590 5230,4567 v1(5232,4565) ; 5179,4642 5039,4782 5039,4896.24 5006.74,4928.5 4848,4928.5 4838.5,4938 4838.5,5246.3 4840.5,5248.3 4840.5,5620.5 4768,5693 4022,5693 ; v1(5262,3827) 5262,3824 5292,3794 v1@5572,3794
RXIN: U50.37
RXIP: U50.40
SPI_MISO: J2.1 J3.7 R40.2 U1.5 U50.30 | length 4553.5
  Top Layer w8: U1.5@2955.63,4309.76 2955.63,4545.37 2922,4579 2922,4680 J3.7@2880,4722 2880,4781 2906,4807 2979,4807 3022,4764 3022,4722 3038,4706 3038,4684 3041,4681 3062.27,4681 3062.8,4680.47 3106.47,4680.47 3130,4704 3130,4752 3142,4764 v1(3633,4764) ; R40.2@4750,5109.53 J2.1@4750,5170
  Bottom Layer w8: J3.7@2880,4722 2880,4933 3201.53,5254.53 4711.47,5254.53 4750,5216 J2.1@4750,5170 ; v1(3633,4764) 3633,4719 3985,4367 4079.48,4367 4160,4447.52 U50.30@4206.77,4447.52
SPI_MOSI: J1.5 J2.2 J3.6 R41.2 U1.4 U2.1 U50.31 | length 6351
  Top Layer w8: U1.4@2975.32,4309.76 2975.32,4467.68 2975,4468 2975,4617 J3.6@2980,4622 ; J1.5@3850,5765 3996,5619 v1(3996,5108) 3996,4848 4065,4779 4065,4456 v1(4092,4429) ; v1@3904,4205 v1(3905,4205) 4029,4205 4085,4261 4085,4318.72 4067.22,4336.5 4065.63,4336.5 3972,4430.13 v1(3972,4431) ; U2.1@4097.44,3082.4 4316.4,3082.4 v1(4371,3137) ; R41.2@4650,5109.53 J2.2@4650,5170
  Bottom Layer w8: J3.6@2980,4622 3022,4664 3022,4797.69 3332.31,5108 v1(3996,5108) ; v1(3905,4205) 3953,4205 4102,4056 4323,4056 4496,3883 4496,3391 4356,3251 4356,3152 v1(4371,3137) ; v1(3972,4431) 4088,4431 v1@4091,4428 ; v1@3996,5107 4047,5107 4092,5152 4092,5196 4108,5212 4608,5212 J2.2@4650,5170 ; v1(4092,4429) 4112.95,4429 4151.15,4467.2 U50.31@4206.77,4467.2
SPI_SCK: J1.4 J2.3 J3.8 U1.3 U2.32 U50.28 | length 7168.5
  Top Layer w8: v1(2936,4761) 2936,4698 2960,4674 2986.73,4674 3021.53,4639.2 3021.53,4604.8 2996,4579.27 2996,4452 2995,4451 U1.3@2995,4309.76 ; v1(3500,5225) 3682,5407 3682,5687.63 3750,5755.63 J1.4@3750,5765 ; U2.32@4068.9,3053.86 4068.9,3054 4355,3054 v1(4421,3120) ; v1@4490.5,4508.5 4490.5,4571.22 ; 4491,4571.72 4491,4660.72 4552.5,4722.22 4552.5,5167.5 J2.3@4550,5170 ; v1@4492.5,4506.5 4558,4441 4558,4430.88 4575,4413.88 4575,4352 4687,4240 v1@4687,3649
  Bottom Layer w8: J3.8@2880,4622 2936,4678 ; v1(2936,4761) 2936,4678 ; v1(3500,5225) 3351,5225 ; U50.28@4206.77,4408.15 4298.15,4408.15 4351,4461 4461.04,4461 4478.5,4478.46 4478.5,4492.5 v1@4496,4510 ; v1(4421,3120) 4421,3157 4459,3195 4812.63,3195 4864,3246.37 4864,3289.61 4793.61,3360 4793.61,3532.39 v1(4682,3644) ; J2.3@4550,5170 4592,5128 4672,5128 4692,5148 4692,5216 4673,5235 3499.99,5226.13 3351,5225 ; 2936,4678 2938,4680 2938,4918 3245,5225 3351,5225
  other v1: 4492,4503
SPI_SEL_ACCEL: J2.4 U50.29 | length 903
  Top Layer w8: v1(4304.5,4457) 4358.5,4511 4358.5,4599.5 4474,4715 4474,4995.72 4470,4999.72 4470,5078 4450,5098 J2.4@4450,5170
  Bottom Layer w8: U50.29@4206.77,4427.83 4275.33,4427.83 v1(4304.5,4457)
SPI_SEL_AUDIO: J2.5
SPI_SEL_LCD: J1.3 U50.65 | length 1674.5
  Top Layer w8: 4193,5059 4193,5060 ; v1(4193,5470) 4193,5060 ; v1(4420,4824) 4420,4820 4193,5047 4193,5060
  Bottom Layer w8: J1.3@3650,5765 3945,5470 v1(4193,5470) ; v1(4420,4824) 4420,4820 4429,4811 4450,4811 4471.77,4789.23 4478.08,4789.23 4478.85,4790 4542.5,4790 4552.5,4800 4552.5,4848.5 4544.37,4856.63 U50.65@4544.37,4903.23
SPI_SEL_LED: U2.31 U50.34 | length 2515.8
  Top Layer w8: U2.31@4049.21,3053.86 4049.21,3032 4060.21,3021 4416,3021 4452.19,3057.19 4452.19,3142.9 4410.09,3185 v1(4386,3185) ; v1@4435,4508.5 4433.5,4510 v1(4424,4510) 4424,4488 4440,4472 4494.25,4472 4559,4407.25 4559,4345 4671,4233 4671,3853 4402,3584 4402,3402 4463,3341 v1(4490,3341)
  Bottom Layer w8: U50.34@4206.77,4526.26 4207.51,4527 4294.24,4527 4294.98,4526.26 4407.74,4526.26 v1(4424,4510) ; v1(4386,3185) 4386,3237 v1(4490,3341)
SPI_SEL_RADIO: J3.5 U1.2 U50.35 | length 1993.7
  Top Layer w8: J3.5@2980,4722 2980,4716.47 3031.47,4665 3055.64,4665 3056.17,4664.47 ; U1.2@3014.69,4309.76 3014.69,4541.63 3037.53,4564.47 3037.53,4663.47 ; 3057.12,4663.53 3740.47,4663.53 v1(3746,4658) ; v1(3988,4489) 3988,4472 4064,4396 4145,4396 4291,4542 4291,4550 v1@4301,4550
  Bottom Layer w8: v1(3746,4658) 3915,4489 v1(3988,4489) ; U50.35@4206.77,4545.94 4290.94,4545.94 v1@4298,4553
  other v1: 4299,4557
SW_BLUE: R23.1 SW4.3 U50.60 | length 2262.2
  Top Layer w8: v1@4517,4830 4490,4803 4490,4708.37 4475,4693.37 4475,4632.21 4417.29,4574.5 4407.5,4574.5 4394,4561 4394,4488 4426,4456 4487.63,4456 4543,4400.63 4543,4201 4537,4195 ; 4536,4195 4480.5,4139.5 4480.5,4012.5 v1(4571,3922) ; SW4.3@4660,3170 4660,3144 4720.47,3083.53 R23.1@4720.47,3095 v1@4720.47,3378.53
  Bottom Layer w8: U50.60@4445.94,4903.23 4445.94,4863.06 4471,4838 4511,4838 v1@4518,4831 ; v1(4571,3922) 4571,3528 v1(4720,3379)
  other v1: 4518,4830
SW_GREEN: R21.1 SW3.3 U50.19 | length 1796.9
  Top Layer w8: v1(3918,3654) 3918,3570 SW3.3@3910,3570 3970.47,3509.53 R21.1@3970.47,3500 ; v1(4378,4410) 4386,4410 4387,4411 4387,4399.61 4392.5,4405.11 4392.5,4422.22 4410.28,4440 4481,4440 4527,4394 4527,4230 4464.5,4167.5 v1(4464.5,3698)
  Bottom Layer w8: v1(3918,3654) 3921.5,3650.5 4417,3650.5 v1(4464.5,3698) ; v1(4378,4410) 4386,4410 4387,4411 4387,4399.61 4386.89,4399.5 U50.19@4386.89,4306.77
SW_RED: R22.1 SW2.3 U50.22 | length 1994.3
  Top Layer w8: SW2.3@3160,3170 SW2.3@3163,3170 ; R22.1@3220.47,3095 3220.47,3112.53 SW2.3@3163,3170 ; v1(3263,3170) SW2.3@3163,3170 ; v1(3896,4124) 3915.09,4124 3948.09,4157 4110,4157 4164,4211 v1(4151,4211)
  Bottom Layer w8: v1(3263,3170) 3273,3180 3273,3500.49 3896,4123.49 v1(3896,4124) ; v1(4151,4211) 4305,4211 4327.83,4233.83 U50.22@4327.83,4306.77
TXON: U50.46
TXOP: U50.43
USBDM: J7.2 U50.70 | length 4973.8
  Top Layer w8: v1(3472,4345) 3579,4345 3667.22,4433.22 3667.5,4433.22 3723.28,4489 ; v1(3632,2287) 3632,2291 3654.07,2313.07 J7.2@3654.07,2340.96 ; 3723.28,4489.28 3831,4597 v1(3831,4747) ; v1(4186,4938) 4188,4938 4220.5,4905.5 4220.5,4892.5 v1(4332,4781)
  Bottom Layer w8: v1(3472,4345) 3472,4343.28 3470.28,4343.28 3430,4303 3430,3770.7 3035,3375.7 3035,3151.37 2840,2956.37 2840,2652.37 3204.37,2288 3377,2288 3497,2168 3560,2168 3601,2209 3601,2256 v1(3632,2287) ; v1(3831,4747) 3831,4749 3815,4765 3815,4877.63 3823,4885.63 3823.25,4885.63 3954.63,5017 4147,5017 4147,4977 v1(4186,4938) ; v1(4332,4781) 4332,4780 4356.77,4755.23 4492.16,4755.23 4492.93,4756 4548.07,4756 4548.84,4755.23 4576.4,4755.23 4641.02,4819.84 4641.02,4901.45 U50.70@4642.8,4903.23
USBDP: J7.3 U50.71 | length 5155.5
  Top Layer w8: v1(3672,2266) 3672,2272 3685,2285 J7.3@3685,2335 3687.15,2337.15 J7.3@3687.15,2360.52 ; v1@3706,4431 3706,4421 3709,4421 3862,4574 v1(3862,4777) ; v1@4190,4885 4190,4862 4222.87,4829.13 4223,4829.13 v1(4315.13,4737) ; v1(4191,4888) 4191.4,4887.8 v1@4195,4886
  Bottom Layer w8: v1(3672,2266) 3672,2257.37 3566.63,2152 3490.37,2152 3370.37,2272 3197.75,2272 2824,2645.75 2824,2963 3019,3158 3019,3382.33 3414,3777.33 3414,4355 3443,4384 3660,4384 v1(3697,4421) ; v1(3862,4777) 3834,4805 3834,4873.75 3952.25,4992 4131,4992 4131,4948 v1(4191,4888) ; v1(4315.13,4737) 4341,4737 ; 4341,4738 4486.76,4738 4487.57,4737.19 4553.43,4737.19 4554.24,4738 4581.8,4738 4662.48,4818.68 U50.71@4662.48,4903.23
USBOID: R3.1 U50.66 | length 4980.7
  Top Layer w8: v1(2755,2857) 3078,2534 3105,2534 v1(3112,2527) ; v1(3536,4435) 3636,4435 3712,4511 ; 3713,4511 3801,4599 v1(3801,4711) ; v1(3875,2452) 3884.53,2442.47 R3.1@3884.53,2380
  Bottom Layer w8: v1(2755,2857) 2808,2910 2808,2969.96 3003,3164.96 3003,3388.96 3398,3783.96 3398,4385.85 3449.15,4437 v1@3527,4437 ; v1(3112,2527) 3210,2527 3285,2452 v1(3875,2452) ; v1(3801,4711) 3799,4711 3796,4714 3796,4881.25 3816.37,4901.63 3816.63,4901.63 3948,5033 4090,5033 4150,5093 4570,5093 4570,5069.25 4570.31,5068.94 4570.31,4995.35 4564.06,4989.1 U50.66@4564.06,4903.23
USBORBIAS: R30.1 U50.73 | length 77.7
  Top Layer w8: R30.1@4695.47,5005 4695.47,4974.53 v1(4702,4968)
  Bottom Layer w8: U50.73@4702,4930 v1(4702,4968)
VBAT: J5.14 S1.6 | length 112
  Top Layer w50: S1.6@4550,2718 J5.14@4550,2830
VBAT_SENSE: R34.1 R38.2 U50.92 | length 567.5
  Top Layer w8: v1(5023,4524) 5020,4524 5035,4539 5035,4654 5091,4710 5161,4710 R34.1@5161.47,4710.47 ; R34.1@5160,4710.47 R34.1@5161.47,4710.47 ; R34.1@5162,4711 R34.1@5161.47,4710.47 ; R38.2@5198.53,4710.47 R34.1@5161.47,4710.47
  Bottom Layer w8: U50.92@4803.23,4526.26 4856.26,4526.26 4878,4548 4963,4548 4987.5,4523.5 4988,4524 v1(5023,4524)
VBAT_SW: J1.12 J5.13 R38.1 S1.5 | length 5451.1
  Top Layer w10: J1.12@4550,5765 4514,5729 4514,5585 4623,5476 4921,5476 4937,5460 v1(4937,4964) ; v1(4705,2740) 4705,2738 4706,2737 4706,2663 4787,2582 4939,2582 4969,2552 v1(5061,2552) ; R38.1@5201,4768.53 v1(5257.47,4768.53)
  Top Layer w50: S1.5@4450,2715 J5.13@4450,2830
  Bottom Layer w10: J5.13@4450,2832 J5.13@4450,2830 4450,2773 4483,2740 v1(4705,2740) ; v1(4937,4964) 4997,4964 5150,4811 5259,4811 5259,4771 v1@5257,4769 ; v1(5061,2552) 5061,2555 5067,2549 5255,2549 5304.64,2598.64 5305.46,2598.64 5401.36,2694.54 5401.36,2788.36 5407,2794 ; v1@5256.97,4768.03 5279,4746 5367,4746 5743,4370 5743,3192 5614,3063 5614,3001 5407,2794 ; 5403,2790 5407,2794
VDDA: C28.2 L4.2 U50.3 | length 598
  Bottom Layer w8: C28.2@4440.31,4165 4440.31,4149.69 4480,4110 L4.2@4538.5,4110 4538.5,4080 4595.5,4023 4646,4023 4701.85,4078.85 U50.3@4701.85,4306.77
VDDC: C16.2 C33.2 U50.7 U50.38 U50.88 | length 1039.1
  Top Layer w8: v1(4623.11,4373.11) 4622,4374.22 4622,4619.78 v1@4623.11,4620.89
  Bottom Layer w8: 4145,4605 U50.38@4206.77,4605 4364.35,4605 4392.85,4633.5 4451.5,4633.5 4466,4619 v1@4622,4619 ; v1@4623,4619 4636,4606 4802.23,4606 U50.88@4803.23,4605 ; U50.7@4623.11,4306.77 v1(4623.11,4373.11) ; U50.88@4833.56,4606 4870.69,4606 C16.2@4875,4610.31
  other v1: 4622,4621
XTALNPHY: U50.17
XTALPPHY: U50.16
pads on no net: ANT2.2 D2.2 D2.3 D3.1 D3.3 J1.1 J1.2 J1.7 J1.8 J1.9 J2.6 J2.12 J2.13 J2.14 J2.15 J2.16 J4.7 LDO.4 S1.1 S1.4 SW1.1 SW1.4 SW2.1 SW2.4 SW3.1 SW3.4 SW4.1 SW4.4 U1.21 U2.2 U50.51
copper on no net:
  other v2: 2971.38,4208.38 3018.62,4208.38 2971.38,4255.62 3018.62,4255.62
  other v3: 2960,2830 5040,2830 2960,5170 5040,5170

## Polygon pours and split planes (outlines as drawn)
3.3V on Top Layer "POWERPLANE" (solid, pour order 1000): 4952,2602 4952,2750 4838,2750 4838,2870 4776.45,2940 4767.42,2950 4650,2950 4700,2895 4700,2790 4834,2602
GND on Bottom Layer "LED_GND" (solid, pour order 1001): 3394,2780 3500,2780 3500,2861 3529,2890 4095,2890 4228,3024 4228,3335 3764,3335 3765,3236 3394,2869
GND on Bottom Layer "GND" (solid, pour order 1003): 2485,3620 2948.66,3620 3153,3883 3150,4005 3262,4128 3269,4498 2788.48,4498 2485,4112.54
GND on Bottom Layer "GND" (solid, pour order 1002): 4095,2890 5227,2890 5227,3093 4095,3093

## Other copper
Top Layer:
  region net 3.3V: 3002.45,3209.55 3005.54,3200.04 3053.09,3215.49 3050,3225
  rectangle net 3.3V: 3215,3000 3225,3050
  region net 3.3V: 3133.09,3465.88 3125,3460 3154.39,3419.55 3162.48,3425.43
  region net 3.3V: 3474.46,3140.04 3477.55,3149.55 3430,3165 3426.91,3155.49
  region net 3.3V: 3425,3430 3416.91,3435.88 3387.52,3395.43 3395.61,3389.55
  region net 3.3V: 3752.45,3609.55 3755.54,3600.04 3803.09,3615.49 3800,3625
  rectangle net 3.3V: 3965,3400 3975,3450
  region net 3.3V: 3883.09,3865.88 3875,3860 3904.39,3819.55 3912.48,3825.43
  region net 3.3V: 4502.45,3209.55 4505.54,3200.04 4553.09,3215.49 4550,3225
  region net 3.3V: 4175,3830 4166.91,3835.88 4137.52,3795.43 4145.61,3789.55
  region net 3.3V: 4224.46,3540.04 4227.55,3549.55 4180,3565 4176.91,3555.49
  region net 3.3V: 4633.09,3465.88 4625,3460 4654.39,3419.55 4662.48,3425.43
  rectangle net 3.3V: 4715,3000 4725,3050
  region net 3.3V: 4974.46,3140.04 4977.55,3149.55 4930,3165 4926.91,3155.49
  region net 3.3V: 4925,3430 4916.91,3435.88 4887.52,3395.43 4895.61,3389.55
Multi-Layer:
  circle w10: c4000,4000 r1955

## Silkscreen, mask and mechanical layers (free items; w line width, h text height)
Top Overlay:
  drawing of 2369 lines, arcs and shapes, not listed
  text "sck" at 4583,5241 h45 r90
  text "miso" at 4770,5238 h45 r90
  text "mosi" at 4685,5236 h45 r90
  text "cs" at 4465,5034 h45 r90
  text "gnd" at 4171,4986 h45 r90
  text "gyro" at 3867,4948 h45 r90
  text "FR" at 5401,4810 h90
  text "FL" at 2450,4805 h90
  text "GND" at 2592,4702 h45
  text "Heart" at 5046,4596 h90
  text "Beat" at 5090,4482 h90
  text "RADIO" at 2371,4422 h90
  text "JTAG" at 5213,4238 h90
  text "IRbeacon" at 3828,4140 h90
  text "G" at 3967,3776 h90
  text "RED" at 3132,3520 h90
  text "BLUE" at 4598,3514 h90
  text "RST" at 5497,3510 h90
  text "rone-v1.6" at 5800,3477 h45 r81.85
  text "chg" at 4362,2926 h45 r90
  text "gnd" at 3388,2908 h45
  text "P0A" at 3578,2901 h45 r90
  text "P0B" at 3656,2901 h45 r90
  text "VBAT" at 4563,2900 h45 r90
  text "VBATS" at 4470,2898 h45 r90
  text "usb" at 4631,2897 h45 r90
  text "1" at 3276,2730 h60 r90
  text "1A" at 4172,2697 h45 r90
  text "1B" at 3877,2694 h45 r90
  text "1A" at 3789,2693 h45 r90
  text "Q1B" at 4250,2652 h45 r90
  text "33V" at 4775,2648 h45 r90
  text "ON" at 4652,2510 h90
Bottom Overlay:
  text "8962-CPU" at 5377,4206 h90
  text "FTDI" at 4039,2520 h90
Mechanical 1:
  lines w5: 2000,4000 6000,4000 ; 4000,2000 4000,6000

## Text inside footprints (layer, text, board x,y; h text height)
J3: Top Overlay "1" at 3260,4705 h45